# EAGLE board iterasi3 (EAGLE 9.5.1)
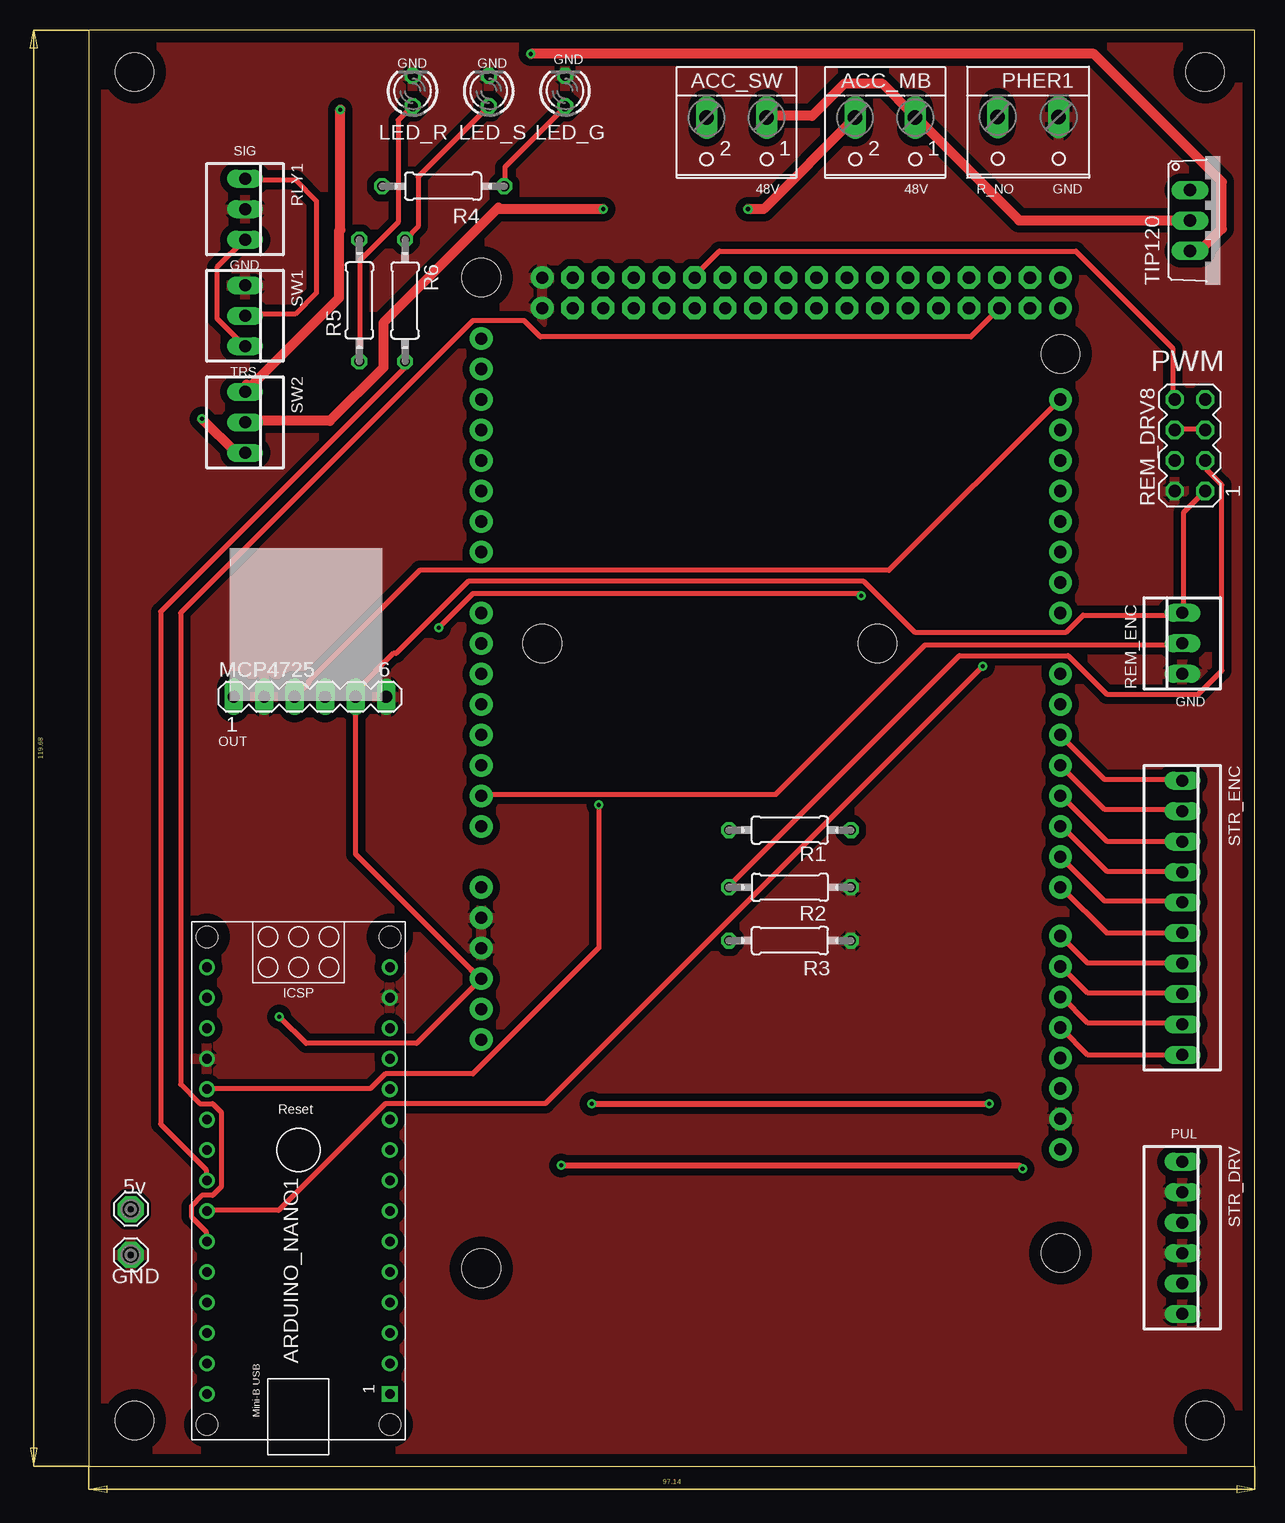
[diagram p0: board, top side]
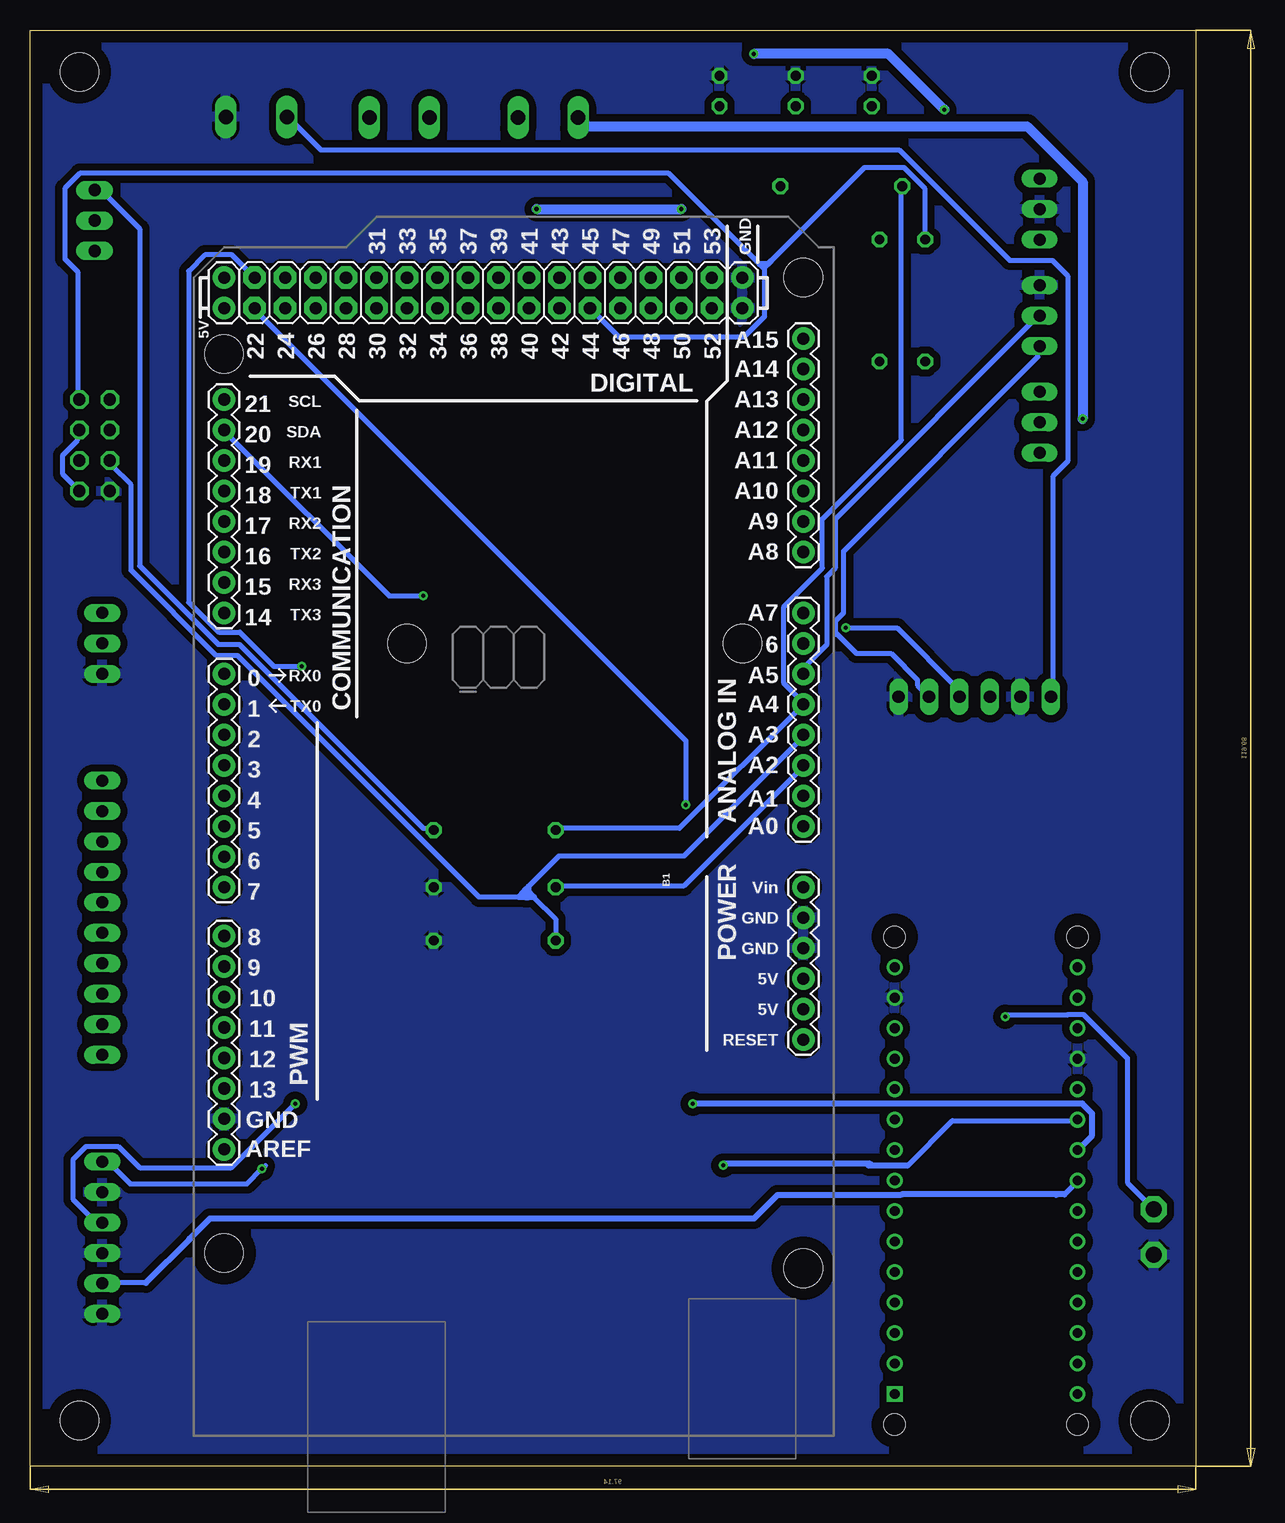
[diagram p1: board, bottom side, seen from below]

Size 97.14 x 119.68 mm. Coordinates in mm from the lower left corner, seen from the top.
Outline: 0,119.68 0,0 97.14,0 97.14,119.68 0,119.68
Copper layers (1*16): Top 0.035mm / dielectric 1.5mm / Bottom 0.035mm
Design rules "default": minimum track width 6mil, minimum drill 0.35mm, track to track 6mil, track to pad 6mil, pad to pad 6mil, via to via 6mil, smd to smd 6mil, copper to edge 40mil, drill to drill 6mil, minimum pad ring 10mil, minimum via ring 8mil, stop-mask expansion 4mil, vias tented up to drill 0mil, thermal gap 10mil
Net classes: 0 default: width 0.406 mm, clearance 0.305 mm; 1 GND: width 0.813 mm, clearance 0.61 mm; 2 48V: width 0.813 mm, clearance 0.61 mm
Holes 3.2 mm at 3.81,3.79 3.81,116.19 93.03,116.19 93.03,3.79

## Footprints (pad centres in the part's own frame; a part is rotated, then mirrored left to right if it is on the bottom)
W237-102 = drill 1.194 long: 1 -2.5,-1.27; 2 2.5,-1.27
ARDUINO_NANO = drill 0.8 square: 1 -20.32,-7.62 | drill 0.8: 2 -17.78,-7.62; 3 -15.24,-7.62; 4 -12.7,-7.62; 5 -10.16,-7.62; 6 -7.62,-7.62; 7 -5.08,-7.62; 8 -2.54,-7.62; 9 0,-7.62; 10 2.54,-7.62; 11 5.08,-7.62; 12 7.62,-7.62; 13 10.16,-7.62; 14 12.7,-7.62; 15 15.24,-7.62; 16 15.24,7.62; 17 12.7,7.62; 18 10.16,7.62; 19 7.62,7.62; 20 5.08,7.62; 21 2.54,7.62; 22 0,7.62; 23 -2.54,7.62; 24 -5.08,7.62; 25 -7.62,7.62; 26 -10.16,7.62; 27 -12.7,7.62; 28 -15.24,7.62; 29 -17.78,7.62; 30 -20.32,7.62 | hole 1.778: -22.86,-7.62; -22.86,7.62; 17.78,7.62; 17.78,-7.62
ARDUINO_MEGA = drill 1.016 pad 1.88: 0 13.97,24.13; 1 11.43,24.13; 2 8.89,24.13; 3 6.35,24.13; 3.3V -13.97,-24.13; 4 3.81,24.13; 5 1.27,24.13; 5V@0 -11.43,-24.13; 5V@1 44.45,24.13; 5V@2 46.99,24.13; 6 -1.27,24.13; 7 -3.81,24.13; 8 -7.874,24.13; 9 -10.414,24.13; 10 -12.954,24.13; 11 -15.494,24.13; 12 -18.034,24.13; 13 -20.574,24.13; 14 19.05,24.13; 15 21.59,24.13; 16 24.13,24.13; 17 26.67,24.13; 18 29.21,24.13; 19 31.75,24.13; 20 34.29,24.13; 21 36.83,24.13; A0 1.27,-24.13; A1 3.81,-24.13; A2 6.35,-24.13; A3 8.89,-24.13; A4 11.43,-24.13; A5 13.97,-24.13; A6 16.51,-24.13; A7 19.05,-24.13; A8 24.13,-24.13; A9 26.67,-24.13; A10 29.21,-24.13; A11 31.75,-24.13; A12 34.29,-24.13; A13 36.83,-24.13; A14 39.37,-24.13; A15 41.91,-24.13; AREF -25.654,24.13; GND@0 -8.89,-24.13; GND@1 -6.35,-24.13; GND@2 44.45,-19.05; GND@3 46.99,-19.05; GND@4 -23.114,24.13; RESET -16.51,-24.13; VIN -3.81,-24.13 | drill 1.016 pad 1.88 octagon: 22 44.45,21.59; 23 46.99,21.59; 24 44.45,19.05; 25 46.99,19.05; 26 44.45,16.51; 27 46.99,16.51; 28 44.45,13.97; 29 46.99,13.97; 30 44.45,11.43; 31 46.99,11.43; 32 44.45,8.89; 33 46.99,8.89; 34 44.45,6.35; 35 46.99,6.35; 36 44.45,3.81; 37 46.99,3.81; 38 44.45,1.27; 39 46.99,1.27; 40 44.45,-1.27; 41 46.99,-1.27; 42 44.45,-3.81; 43 46.99,-3.81; 44 44.45,-6.35; 45 46.99,-6.35; 46 44.45,-8.89; 47 46.99,-8.89; 48 44.45,-11.43; 49 46.99,-11.43; 50 44.45,-13.97; 51 46.99,-13.97; 52 44.45,-16.51; 53 46.99,-16.51 | hole 3.2: -34.29,24.13; -35.56,-24.13; 16.51,8.89; 16.51,-19.05; 40.64,24.13; 46.99,-24.13
LED3MM = drill 0.813 octagon: A -1.27,0; K 1.27,0
SE13 = drill 1.321 pad 2.159 octagon: MP 0,0
MA06-1 = drill 1.016 long: 1 -6.35,0; 2 -3.81,0; 3 -1.27,0; 4 1.27,0; 5 3.81,0; 6 6.35,0
W237-132 = drill 1.194 long: 1 -2.54,-0.635; 2 2.54,-0.635
0207/10 = drill 0.813 octagon: 1 -5.08,0; 2 5.08,0
MA04-2 = drill 1.016 octagon: 1 -3.81,-1.27; 2 -3.81,1.27; 3 -1.27,-1.27; 4 -1.27,1.27; 5 1.27,-1.27; 6 1.27,1.27; 7 3.81,-1.27; 8 3.81,1.27
22-23-2031 = drill 1 long: 1 -2.54,0; 2 0,0; 3 2.54,0
22-23-2061 = drill 1 long: 1 -6.35,0; 2 -3.81,0; 3 -1.27,0; 4 1.27,0; 5 3.81,0; 6 6.35,0
22-23-2101 = drill 1 long: 1 -11.43,0; 2 -8.89,0; 3 -6.35,0; 4 -3.81,0; 5 -1.27,0; 6 1.27,0; 7 3.81,0; 8 6.35,0; 9 8.89,0; 10 11.43,0
TO220AV = drill 1.016 long: B -2.54,-2.54; C 0,-2.54; E 2.54,-2.54

## Placement (x,y rotation side)
ACC_MB  [W237-102]  66.36,111.11 180 top
ACC_SW  [W237-102]  53.98,111.11 180 top
ARDUINO_NANO1  [ARDUINO_NANO]  17.46,26.33 90 top
B1  ARDUINO_MEGA_R3FULL  [ARDUINO_MEGA]  56.83,52.05 90 bottom
LED_G  TLLY4400  [LED3MM]  39.69,114.6 90 top
LED_R  TLLY4400  [LED3MM]  26.99,114.6 90 top
LED_S  TLLY4400  [LED3MM]  33.34,114.6 90 top
LSP1  SE13  [SE13]  3.49,21.41 0 top
LSP2  SE13  [SE13]  3.49,17.6 0 top
MCP4725  [MA06-1]  18.41,64.12 0 top
PHER1  GND_TPS/RELAY_NO  [W237-132]  78.27,111.8 180 top
R1  5k1  [0207/10]  58.42,53 0 top
R2  680  [0207/10]  58.42,48.24 180 top
R3  680  [0207/10]  58.42,43.79 0 top
R4  220  [0207/10]  29.53,106.66 180 top
R5  220  [0207/10]  22.54,97.14 90 top
R6  220  [0207/10]  26.35,97.14 270 top
REM_DRV  [MA04-2]  91.76,85.07 90 top
REM_ENC  22-23-2031  [22-23-2031]  91.12,68.56 90 top
RLY1  22-23-2031  [22-23-2031]  13.02,104.76 270 top
STR_DRV  [22-23-2061]  91.12,19.03 270 top
STR_ENC  22-23-2101  [22-23-2101]  91.12,45.7 270 top
SW1  22-23-2031  [22-23-2031]  13.02,95.87 270 top
SW2  22-23-2031  [22-23-2031]  13.02,86.98 270 top
TIP120  TIP41C  [TO220AV]  94.3,103.8 270 top

## Library data of the parts
ACC_MB ACC_SW = con-wago-500; MPN: 237-102; OC_FARNELL: unknown; OC_NEWARK: 70K9898
ARDUINO_NANO1 = ArduinoNanoV30
B1 = SparkFun-Boards
LED_G LED_R LED_S = led; MF: VISHAY SEMICONDUCTOR; OC_FARNELL: 1612439
LSP1 LSP2 = solpad
MCP4725 REM_DRV = con-lstb; OC_FARNELL: unknown; OC_NEWARK: unknown
PHER1 = con-wago-508; OC_FARNELL: unknown; OC_NEWARK: unknown
R1-R6 = rcl; SPICEPREFIX: R
REM_ENC RLY1 SW1 SW2 = con-molex; MF: MOLEX; MPN: 22-23-2031; OC_FARNELL: 1462950; OC_NEWARK: 30C0862
STR_DRV = con-molex; MF: MOLEX; MPN: 22-23-2061; OC_FARNELL: 1462922; OC_NEWARK: 27C1933
STR_ENC = con-molex; MF: MOLEX; MPN: 22-23-2101; OC_FARNELL: 1756828; OC_NEWARK: 94C0765
TIP120 = transistor-power

## Nets
5V: B1.5V@0 LSP1.MP MCP4725.5 REM_DRV.1 REM_DRV.5 REM_DRV.6 REM_ENC.3 RLY1.3 SW1.3
5V2: ARDUINO_NANO1.12
48V [48V]: ACC_MB.1 ACC_SW.1 TIP120.C
F_MODE: B1.A5 RLY1.1 SW1.2
GAS_EN: B1.A4 R1.1 R4.2
GAS_SIG: MCP4725.1 PHER1.2
GND [GND]: ARDUINO_NANO1.14 ARDUINO_NANO1.19 B1.GND@0 B1.GND@1 B1.GND@2 B1.GND@3 B1.GND@4 LED_G.K LED_R.K LED_S.K LSP2.MP MCP4725.2 MCP4725.6 PHER1.1 R2.1 R3.2 REM_DRV.2 REM_ENC.1 RLY1.2 STR_DRV.2 STR_DRV.4 STR_DRV.6 SW1.1
L_IS: B1.A3 R3.1 REM_DRV.4
L_PWM: B1.45 REM_DRV.8
N$1: R1.2 TIP120.B
N$2 [48V]: SW2.1 TIP120.E
N$4 [48V]: ACC_MB.2 SW2.2
N$5 [48V]: ACC_SW.2 SW2.3
N$7: LED_G.A R4.1
N$8: LED_R.A R5.1
N$9: LED_S.A R6.1
N$10: ARDUINO_NANO1.20 B1.22
N$11: ARDUINO_NANO1.24 B1.23
N$12: ARDUINO_NANO1.25 B1.24
R_IS: B1.A2 R2.2 REM_DRV.3
R_PWM: B1.44 R5.2 REM_DRV.7
REM_ENC: B1.A1 REM_ENC.2
SCL: B1.21 MCP4725.3
SDA: B1.20 MCP4725.4
SEN1: B1.2 STR_ENC.1
SEN2: B1.3 STR_ENC.2
SEN3: B1.4 STR_ENC.3
SEN4: B1.5 STR_ENC.4
SEN5: B1.6 STR_ENC.5
SEN6: B1.7 STR_ENC.6
SEN7: B1.8 STR_ENC.7
SEN8: B1.9 STR_ENC.8
SEN9: B1.10 STR_ENC.9
SEN10: B1.11 STR_ENC.10
STR_DIR: ARDUINO_NANO1.22 STR_DRV.3
STR_ENA: ARDUINO_NANO1.23 R6.2 STR_DRV.5
STR_PUL: ARDUINO_NANO1.21 STR_DRV.1
VIN: ARDUINO_NANO1.15

## Tracks (layer width: path | path; a pad name or v marks a point on that pad's centre or on a via)
5V  (via drill 0.35)
  Top 0.406: REM_DRV.6 90.5,86.39 92.99,86.39 REM_DRV.5 | REM_DRV.1 92.99,81.23 91.21,79.46 91.21,71.1 REM_ENC.3 91.03,70.92 82.86,70.92 81.43,69.5 68.81,69.5 64.58,73.73 31.61,73.73 25.6,67.72 25.38,67.72 22.23,64.56 MCP4725.5 22.23,51.01 31.86,41.37 32.54,40.7 B1.5V@0 27.3,35.22 18.1,35.22 v15.88,37.45 | SW1.3 12.98,93.33 10.67,95.64 10.67,99.9 12.98,102.22 RLY1.3 | 32.35,40.33 32.19,40.18
  Top 0.508: B1.5V@0 32.64,40.62 32.35,40.33 | 31.86,41.37 32.19,41.04 32.19,40.18
  Bottom 0.406: REM_DRV.5 93.17,86.21 93.17,85.5 94.41,84.26 94.41,82.66 93.17,81.41 REM_DRV.1 | 30.05,69.83 30.05,70.39 29.34,71.1 29.34,76.26 13.16,92.44 13.16,93.33 SW1.3 | 30.05,69.83 30.05,69.32 | v15.88,37.45 15.72,37.6 10.69,37.6 10.64,37.65 9.36,37.65 5.7,34 5.7,23.62 LSP1.MP | 30.05,69.83 30.05,69.49 28.28,67.72 25.38,67.72 23.19,65.53 23.19,65.08 MCP4725.5
48V
  Top 0.813: TIP120.C 91.75,103.81 77.52,103.81 68.99,112.35 ACC_MB.1 68.63,112.7 66.14,115.19 62.94,115.19 60.27,112.53 56.54,112.53 ACC_SW.1
F_MODE
  Top 0.406: SW1.2 13.16,95.99 17.18,95.99 18.96,97.77 18.96,105.42 17.18,107.19 13.16,107.19 RLY1.1
  Bottom 0.406: B1.A5 32.54,66.12 32.54,66.66 30.76,68.43 30.76,74.12 30.05,74.83 30.05,78.92 13.16,95.81 SW1.2
GAS_EN
  Bottom 0.406: R1.1 53.34,53.14 43.03,53.14 32.72,63.45 B1.A4 32.72,63.63 34.31,65.23 34.31,71.63 31.11,74.83 31.11,78.92 24.54,85.5 24.54,106.66 R4.2
GAS_SIG
  Bottom 0.406: MCP4725.1 11.91,64.17 11.91,82.48 10.67,83.72 10.67,99.19 11.95,100.48 15.51,100.48 24.71,109.68 72.9,109.68 75.56,112.35 PHER1.2
GND
  pour Top: -4.33,124.44 100.01,124.44 100.01,-3.72 -4.33,-3.72
  pour Bottom: -10.5,129.2 102.55,129.2 102.55,-8.91 101.28,-10.18 -7.94,-10.18
L_IS
  Bottom 0.406: R3.1 53.34,45.61 55.16,47.43 55.56,47.43 | 56.49,47.43 55.88,47.43 | 56.49,47.43 55.94,47.98 55.62,48.3 53.07,50.84 42.66,50.84 32.72,60.79 B1.A3 | 56.49,47.43 59.72,47.43 79.83,67.54 81.61,67.54 88.72,74.66 88.72,81.77 90.32,83.37 90.32,83.72 REM_DRV.4
  Bottom 0.508: 55.56,47.43 55.88,47.43 55.94,47.48 55.94,47.98 55.71,47.98 | 55.16,47.43 55.71,47.98 | 55.62,48.3 55.62,48.07 55.71,47.98
L_PWM
  Top 0.406: REM_DRV.8 90.32,88.88 90.32,93.17 82.25,101.25 52.55,101.25 50.49,99.19 B1.45
N$1
  Bottom 0.406: R1.2 63.65,53.14 64.36,53.14 79.69,68.47 81.47,68.47 88.01,75.01 88.01,103.1 91.21,106.3 91.75,106.3 TIP120.B
N$2  (via drill 0.35)
  Top 0.813: 13.16,90.12 13.16,89.59 SW2.1 20.87,97.36 20.87,102.91 20.95,103 v20.95,113.03 | v36.83,117.68 83.74,117.68 94.41,107.02 94.41,103.1 92.63,101.33 91.92,101.33 TIP120.E
  Bottom 0.813: v20.95,113.03 25.61,117.68 v36.83,117.68
N$4  (via drill 0.35)
  Top 0.813: SW2.2 13.16,87.1 20.09,87.1 24.54,91.55 24.54,95.28 34.14,104.88 34.27,104.76 v42.86,104.76 | ACC_MB.2 63.83,112.35 56.24,104.76 v54.93,104.76
  Bottom 0.813: v54.93,104.76 v42.86,104.76
N$5  (via drill 0.35)
  Top 0.813: SW2.3 12.27,84.44 v9.42,87.28
  Bottom 0.813: v9.42,87.28 9.42,107.02 14.05,111.64 50.67,111.64 51.38,112.35 ACC_SW.2
N$7
  Top 0.406: R4.1 34.67,106.66 34.67,108.26 39.65,113.24 LED_G.A
N$8
  Top 0.406: R5.1 22.58,92.08 22.58,100.44 25.78,103.64 25.78,112.17 26.85,113.24 LED_R.A
N$9
  Top 0.406: LED_S.A 27.45,107.44 27.45,103.31 R6.1
N$10  (via drill 0.35)
  Top 0.406: v42.49,55.1 42.49,43.18 32,32.7 24.71,32.7 23.47,31.45 9.96,31.45 ARDUINO_NANO1.20
  Bottom 0.406: v42.49,55.1 42.49,60.43 78.41,96.35 B1.22
N$11  (via drill 0.35)
  Top 0.406: v74.5,66.66 38.05,30.21 24.71,30.21 15.82,21.32 9.96,21.32 ARDUINO_NANO1.24
  Bottom 0.406: v74.5,66.66 76.81,66.66 79.65,69.5 81.43,69.5 83.92,71.99 83.92,99.57 82.56,100.93 80.33,100.93 78.59,99.19 B1.23
N$12
  Top 0.406: ARDUINO_NANO1.25 9.78,18.83 9.78,19.54 8.53,20.78 8.53,21.67 9.42,22.56 10.31,22.56 11.02,23.27 11.02,29.5 10.31,30.21 9.25,30.21 7.64,31.81 7.64,71.1 32,95.46 36.27,95.46 37.62,94.11 73.51,94.11 75.74,96.35 B1.24
R_IS
  Top 0.406: REM_DRV.3 93.17,83.72 93.17,83.01 94.41,81.77 94.41,66.3 92.46,64.34 84.81,64.34 81.61,67.54 72.54,67.54 53.34,48.34 R2.2
  Bottom 0.406: R2.2 53.34,48.34 42.67,48.34 32.72,58.3 B1.A2
R_PWM
  Bottom 0.406: 35.92,99.9 35.38,100.44 27.6,108.22 24.32,108.22 22.58,106.48 22.58,102.22 R5.2 | 35.92,99.9 35.92,95.81 37.62,94.11 48.08,94.11 50.32,96.35 B1.44 | REM_DRV.7 93.17,88.88 93.17,99.55 94.23,100.62 94.23,106.48 92.99,107.73 43.92,107.73 36.35,100.16 36.09,99.9 35.92,99.9
  Bottom 0.508: 35.38,100.44 35.66,100.16 36.35,100.16
REM_ENC
  Top 0.406: REM_ENC.2 91.03,68.43 69.7,68.43 57.25,55.99 32.72,55.99 B1.A1
SCL
  Top 0.406: MCP4725.3 17.25,64.17 18.31,65.23 18.31,65.41 27.56,74.66 66.67,74.66 80.9,88.88 B1.21
SDA  (via drill 0.35)
  Top 0.406: v29.16,69.86 32,72.7 64.19,72.7 v64.36,72.52
  Bottom 0.406: v29.16,69.86 24.89,69.86 19.74,64.7 19.74,64.17 MCP4725.4 | v64.36,72.52 67.21,72.52 80.9,86.21 B1.20
SEN1
  Top 0.406: STR_ENC.1 91.03,57.23 84.63,57.23 81.08,60.79 B1.2
SEN2
  Top 0.406: STR_ENC.2 91.03,54.74 84.63,54.74 81.08,58.3 B1.3
SEN3
  Top 0.406: STR_ENC.3 91.03,52.07 84.81,52.07 81.08,55.81 B1.4
SEN4
  Top 0.406: STR_ENC.4 91.03,49.59 84.81,49.59 81.08,53.32 B1.5
SEN5
  Top 0.406: STR_ENC.5 91.03,47.1 84.63,47.1 81.08,50.65 B1.6
SEN6
  Top 0.406: STR_ENC.6 84.81,44.43 81.08,48.16 B1.7
SEN7
  Top 0.406: STR_ENC.7 91.03,41.94 83.21,41.94 81.08,44.07 B1.8
SEN8
  Top 0.406: STR_ENC.8 91.03,39.45 83.21,39.45 81.08,41.58 B1.9
SEN9
  Top 0.406: STR_ENC.9 91.03,36.96 83.21,36.96 81.08,39.1 B1.10
SEN10
  Top 0.406: STR_ENC.10 91.03,34.29 83.21,34.29 81.08,36.43 B1.11
STR_DIR  (via drill 0.35)
  Top 0.508: v41.91,30.2 v75.03,30.2 v75.03,30.21
  Bottom 0.406: v75.03,30.21 80.37,24.87 88.01,24.87 89.79,26.65 92.46,26.65 93.52,25.58 93.52,22.21 91.75,20.43 91.21,20.43 STR_DRV.3
  Bottom 0.508: ARDUINO_NANO1.22 8.63,27.55 8.63,29.38 9.42,30.17 9.42,30.2 v41.91,30.2
STR_ENA
  Top 0.406: ARDUINO_NANO1.23 9.78,23.8 9.78,24.69 5.98,28.49 5.98,71.21 26.31,91.55 26.31,91.9 R6.2
  Bottom 0.406: 87.48,15.27 91.03,15.27 STR_DRV.5 | 10.93,22.66 9.96,23.63 ARDUINO_NANO1.23 | 11.56,22.66 11.66,22.56
  Bottom 0.508: 10.93,22.66 11.56,22.66 24.5,22.66 24.58,22.58 34.87,22.58 36.82,20.63 82.15,20.63 83.83,18.95 83.83,18.92 87.48,15.27
STR_PUL  (via drill 0.35)
  Top 0.508: v39.37,25.06 77.52,25.06 v77.81,24.77
  Bottom 0.406: 27.25,25.05 27.11,25.19 | 24.02,25.05 20.28,28.78 9.96,28.78 ARDUINO_NANO1.21 | 77.53,25.05 v77.81,24.77 79.06,23.53 88.8,23.53 90.5,25.23 91.03,25.23 STR_DRV.1
  Bottom 0.508: 24.02,25.05 27.25,25.05 | 27.11,25.19 39.24,25.19 v39.37,25.06

## Text on the board
tNames: GND | GND | GND | SIG | 48V | 48V | R_NO | GND | GND | PWM | TRS | GND | OUT | PUL | 5v | GND